# Altium PCB SDI_1521L_BREAKOUT_BOARD.PcbDoc
Units mil, origin at the board's own origin, x right, y up, seen from the top; angles counter-clockwise.
Board outline 1100 x 900 mil, 2 copper layers (Top Layer, Bottom Layer); 3 components, 16 nets, 40 pads, 0 vias.
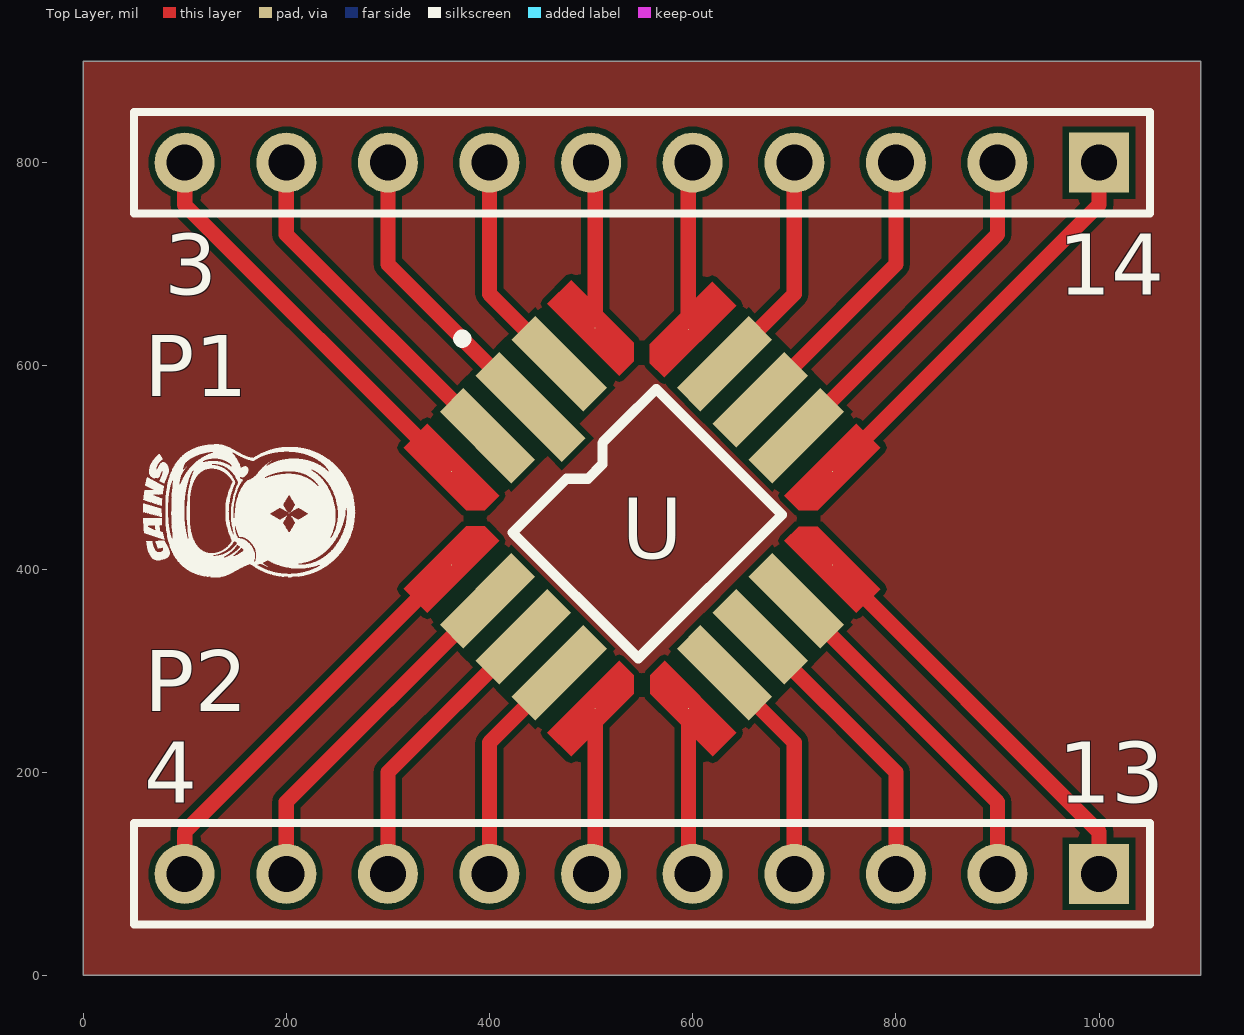
[diagram p0: Top Layer view]
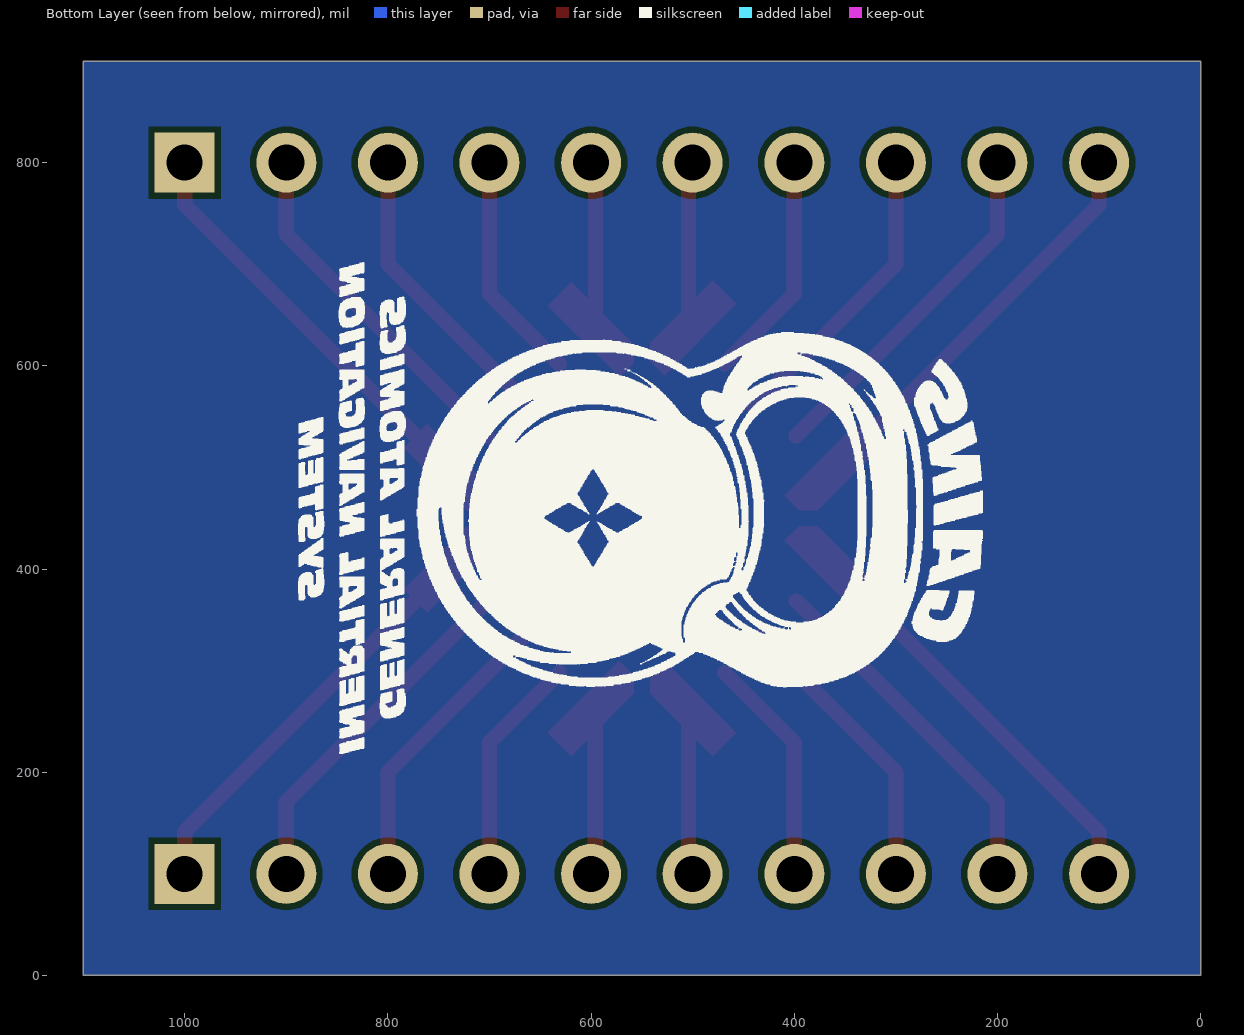
[diagram p1: Bottom Layer view, seen from below]

## Layer stack, top to bottom
Top Solder: solder mask 0.4, Solder Resist, Dk 3.5
Top Layer: signal copper 1.4
Dielectric 1: dielectric 12.6, FR-4, Dk 4.8
Bottom Layer: signal copper 1.4
Bottom Solder: solder mask 0.4, Solder Resist, Dk 3.5

## Board outline
0,0 1100,0 1100,900 0,900

## Design rules (kind name [scope] priority, off if disabled: settings)
Clearance "Clearance~Sunstone Circuits" [All] p1: gap=6 ignorepadtopadclearanceinfootprint=FALSE except(0: Arc-Hole Track-Hole SMDPad-Hole THPad-Hole Via-Hole Fill-Hole Poly-Hole Region-Hole Text-Hole) // Sunstone Circuits Minimum Clearance Rule (Double Sided)
HoleSize "HoleSize~Sunstone Circuits" [All] p1: absolutevalues=TRUE maxlimit=251 minlimit=16 maxpercent=80.000 minpercent=20.000 // SSC Hole Size Rule For Single Sided & Double Sided Designs.
HoleSize Testpoint [All] p2: absolutevalues=TRUE maxlimit=100 minlimit=1 maxpercent=80.000 minpercent=20.000
HoleSize TestPointUsage [All] p3: absolutevalues=TRUE maxlimit=100 minlimit=1 maxpercent=80.000 minpercent=20.000
MinimumAnnularRing "MinimumAnnularRing~Sunstone Circuits" [All] p1: minimumring=7 // Sunstone Circuits Minimum Annular Ring (Double Sided)
PlaneClearance "PlaneClearance~Sunstone Circuits" [All] p1: clearance=12 // Sunstone Circuits Power Plane Clearance Rule (Double Sided)
PlaneConnect "PlaneConnect~Sunstone Circuits" [All] p1: planeconnectstyle=Relief reliefexpansion=10 reliefentries=4 reliefconductorwidth=8 reliefairgap=10 // Sunstone Circuits Power Plane Connect Rule (Double Sided)
PolygonConnect "PolygonConnect~Sunstone Circuits" [All] p1: connectstyle=Relief reliefconductorwidth=8 reliefentries=4 polygonreliefangle="90 Angle" airgapwidth=10 // Sunstone Circuits Polygon Connect Style (Double Sided)
RoutingVias "RoutingVias~Sunstone Circuits" [All] p1: holewidth=16 width=30 viastyle="Through Hole" minholewidth=16 minwidth=30 maxholewidth=20 maxwidth=40 // Sunstone Circuits Routing Vias Rule (Double Sided)
ShortCircuit "ShortCircuit~Sunstone Circuits" [All] p1: allowed=FALSE // Sunstone Circuits Short Circuit Rule~Do Not Allow (Double Sided)
SolderMaskExpansion "SolderMaskExpansion~Sunstone Circuits" [All] p1: expansion=3 istentingtop=FALSE // Sunstone Circuits Solder Mask Expansion Rule (Double Sided)
ViasUnderSMD "ViasUnderSMD~Sunstone Circuits" [All] p1: allowed=FALSE // Sunstone Circuits Vias Under SMD~Do Not Allow (Double Sided)
Width "Width~Sunstone Circuits" [All] p1: maxlimit=100 minlimit=6 preferedwidth=10 // Sunstone Circuits Minimum Width Rule (Double Sided)
26 further rules are at their usual default settings.

## Components (designator, comment, footprint, x,y, rotation, side; value= is the part's Value field where it differs from the comment)
P1 "Header 10" HDR1X10 1000,800 r180 top
P2 "Header 10" HDR1X10 1000,100 r180 top
U "SDI1521L" "SDI 1521L" 550,450 r45 top

## Footprints (in the part's own frame and the unit in brackets; to place one, negate y for a bottom-side part, rotate by r counter-clockwise, add the part's x,y. Pads: shape width x height; smd on the part's side, far side on the other; paste and mask are expansions set on the pad)
HDR1X10 [mm] "Connector; Header; 10 Position"
  rect 1.5x1.5 hole 0.9: 1(0,0)
  round 1.5 hole 0.9: 2(2.54,0) 3(5.08,0) 4(7.62,0) 5(10.16,0) 6(12.7,0) 7(15.24,0) 8(17.78,0) 9(20.32,0) 10(22.86,0)
  silkscreen extent -1.27,-1.27 24.13,1.27
"SDI 1521L" [mm]
  rect 0.84x3.05 smd: 1(0,3.935)
  rect 0.84x2.54 smd: 2(-1.27,4.19) 10(-1.27,-4.19) 11(0,-4.19) 12(1.27,-4.19) 20(1.27,4.19)
  round 0.025 smd: 3(-2.54,4.191) 4(-4.19,2.54) 8(-4.191,-2.54) 9(-2.54,-4.191) 13(2.54,-4.191) 14(4.191,-2.54) 18(4.154,2.515) 19(2.54,4.191)
  rect 2.54x0.84 smd: 5(-4.19,1.27) 6(-4.19,0) 7(-4.19,-1.27) 15(4.19,-1.27) 16(4.19,0) 17(4.19,1.27)
  Top Layer region: -2.12,-5.461 -2.96,-5.461 -2.96,-3.251 -2.63,-2.921 -2.12,-2.921
  Top Layer region: -5.461,-2.12 -5.461,-2.96 -3.251,-2.96 -2.921,-2.63 -2.921,-2.12
  Top Layer region: -2.12,5.461 -2.96,5.461 -2.96,3.251 -2.63,2.921 -2.12,2.921
  Top Layer region: -5.46,2.12 -5.46,2.96 -3.25,2.96 -2.92,2.63 -2.92,2.12
  Top Layer region: 2.12,5.461 2.96,5.461 2.96,3.251 2.63,2.921 2.12,2.921
  Top Layer region: 5.424,2.095 5.424,2.935 3.214,2.935 2.884,2.604 2.884,2.095
  Top Layer region: 5.461,-2.12 5.461,-2.96 3.251,-2.96 2.921,-2.63 2.921,-2.12
  Top Layer region: 2.12,-5.461 2.96,-5.461 2.96,-3.251 2.63,-2.921 2.12,-2.921
  silkscreen extent -2.54,-2.41 2.54,6.45

## Part data
P1 P2: "Header, 10-Pin", LatestRevisionDate=17-Jul-2002, LatestRevisionNote="Re-released for DXP Platform.", Publisher="Altium Limited"
U: "SDI1521L Accelerometer +/- 2G"

## Nets (pads, with @x,y where several pads share a name; then routed paths per layer and width w, separated by ;. In a path a pad name is that pad's centre, name@x,y a point inside that pad or via, vN(x,y) a via of type N, cw(c..) or ccw(c..) an arc to the next point about the centre after c; other vN are vias at no path point)
GND: 
NetP1_1: P1.1 U.14 | length 412.8
  Top Layer w15: U.14 1000,758.58 P1.1
NetP1_2: P1.2 U.15 | length 350.7
  Top Layer w15: U.15 900,729.29 P1.2
NetP1_3: P1.3 U.16 | length 288.6
  Top Layer w15: U.16 800,700 P1.3
NetP1_4: P1.4 U.17 | length 226.5
  Top Layer w15: U.17 700,670.71 P1.4
NetP1_7: P1.7 U.20 | length 226.5
  Top Layer w15: P1.7 400,670.71 U.20
NetP1_8: P1.8 U.1 | length 298.6
  Top Layer w15: P1.8 300,700 U.1
NetP1_10: P1.10 U.3 | length 412.8
  Top Layer w15: P1.10 100,758.58 U.3
NetP2_1: P2.1 U.13 | length 412.8
  Top Layer w15: U.13 1000,141.42 P2.1
NetP2_2: P2.2 U.12 | length 350.7
  Top Layer w15: U.12 900,170.71 P2.2
NetP2_3: P2.3 U.11 | length 288.6
  Top Layer w15: U.11 800,200 P2.3
NetP2_4: P2.4 U.10 | length 226.5
  Top Layer w15: U.10 700,229.29 P2.4
NetP2_5: P2.5 U.9 | length 164.3
  Top Layer w15: U.9 595.96,104.04 P2.5
NetP2_6: P2.6 U.8 | length 164.3
  Top Layer w15: P2.6 504.04,104.04 U.8
NetP2_7: P2.7 U.7 | length 226.5
  Top Layer w15: P2.7 400,229.29 U.7
NetP2_10: P2.10 U.4 | length 412.9
  Top Layer w15: P2.10 100,141.42 U.4
pads on no net: P1.5 P1.6 P1.9 P2.8 P2.9 U.2 U.5 U.6 U.18 U.19
copper on no net: | length 1320.5
  Top Layer w15: 200,100 200,170.71 398,368.71 ; 200,800 200,729.29 398,531.29 ; 300,100 300,200 433.36,333.36 ; 500,800 504.04,795.96 504.04,637.38 ; 595.64,635.64 595.64,795.64 600,800

## Polygon pours and split planes (outlines as drawn)
GND on Top Layer "GND_L01_P000" (solid, pour order 0): 0,900 1100,900 1100,0 0,0
GND on Bottom Layer "GND_L02_P001" (solid, pour order 1): 0,900 1100,900 1100,0 0,0

## Silkscreen, mask and mechanical layers (free items; w line width, h text height)
Top Overlay:
  drawing of 8 lines, arcs and shapes, not listed
  text "3" at 80,670 h60
  text "14" at 960,670 h60
  text "4" at 60,170 h60
  text "13" at 960,170 h60
Bottom Overlay:
  drawing of 46 lines, arcs and shapes, not listed